# EAGLE board full wave (EAGLE 7.5.0)
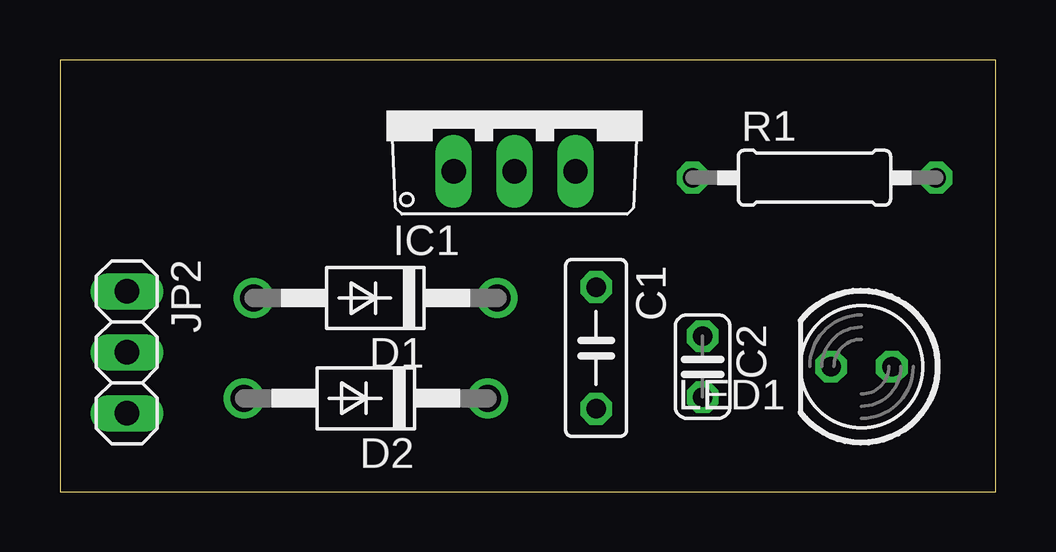
[diagram p0: board, top side]
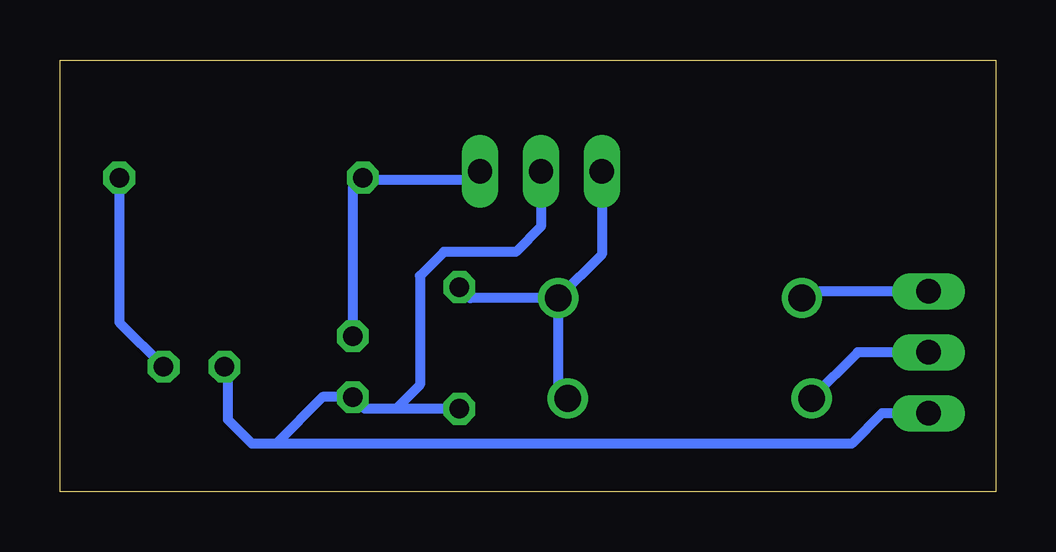
[diagram p1: board, bottom side, seen from below]

Size 39 x 18 mm. Coordinates in mm from the lower left corner, seen from the top.
Outline: 0,0 39,0 39,18 0,18 0,0
Copper layers (1*16): Top 0.035mm / dielectric 1.5mm / Bottom 0.035mm
Design rules "default": minimum track width 10mil, minimum drill 24mil, track to track 8mil, track to pad 8mil, pad to pad 8mil, via to via 8mil, smd to smd 8mil, copper to edge 40mil, drill to drill 8mil, minimum pad ring 10mil, minimum via ring 8mil, stop-mask expansion 4mil, vias tented up to drill 0mil, thermal gap 10mil

## Footprints (pad centres in the part's own frame; a part is rotated, then mirrored left to right if it is on the bottom)
C050-025X075 = drill 0.813 octagon: 1 -2.54,0; 2 2.54,0
C025-024X044 = drill 0.813 octagon: 1 -1.27,0; 2 1.27,0
DO41-10 = drill 1.118: A 5.08,0; C -5.08,0
TO220V = drill 1.016 long: 1 -2.54,-2.54; 2 0,-2.54; 3 2.54,-2.54
1X03 = drill 1.016 long: 1 -2.54,0; 2 0,0; 3 2.54,0
LED5MM = drill 0.813 octagon: A -1.27,0; K 1.27,0
0207/10 = drill 0.813 octagon: 1 -5.08,0; 2 5.08,0

## Placement (x,y rotation side)
C1  470uF/25v  [C050-025X075]  22.35,5.99 270 top
C2  0.1uF  [C025-024X044]  26.79,5.21 270 top
D1  1N4004  [DO41-10]  13.15,8.07 180 top
D2  1N4004  [DO41-10]  12.75,3.89 180 top
IC1  7805TV  [TO220V]  18.95,15.89 0 top
JP2  12v  [1X03]  2.79,5.81 270 top
LED1  blue  [LED5MM]  33.41,5.21 180 top
R1  1k  [0207/10]  31.45,13.09 0 top

## Library data of the parts
C1 C2 R1 = rcl
D1 D2 = diode
IC1 = linear
JP2 = pinhead
LED1 = led

## Nets
GND: C1.2 C2.2 IC1.2 JP2.3 LED1.K
N$1: C1.1 D1.C D2.C IC1.1
N$2: D1.A JP2.1
N$3: C2.1 IC1.3 R1.1
N$4: LED1.A R1.2
N$5: D2.A JP2.2

## Tracks (layer width: path | path; a pad name or v marks a point on that pad's centre or on a via)
GND
  Bottom 0.406: C1.2 25,3.45 | 25,3.45 26.3,3.45 C2.2 28.06,3.94 30,2 | IC1.2 18.95,11.05 20,10 23,10 24,9 24,4.45 25,3.45 | JP2.3 4.73,3.27 6,2 30,2 | 30,2 31,2 32,3 32,5.07 LED1.K
N$1
  Bottom 0.406: IC1.1 16.41,9.89 D1.C | D1.C 18.23,4.29 D2.C | D1.C 21.89,8.07 C1.1
N$2
  Bottom 0.406: JP2.1 7.79,8.35 D1.A
N$3
  Bottom 0.406: C2.1 26.79,12.67 R1.1 26.28,13 22,13 21.65,13.35 IC1.3
N$4
  Bottom 0.406: R1.2 36.53,7.06 LED1.A
N$5
  Bottom 0.406: JP2.2 5.75,5.81 D2.A